# EAGLE board 2016-02-08_10-59-06 (EAGLE 7.3.0)
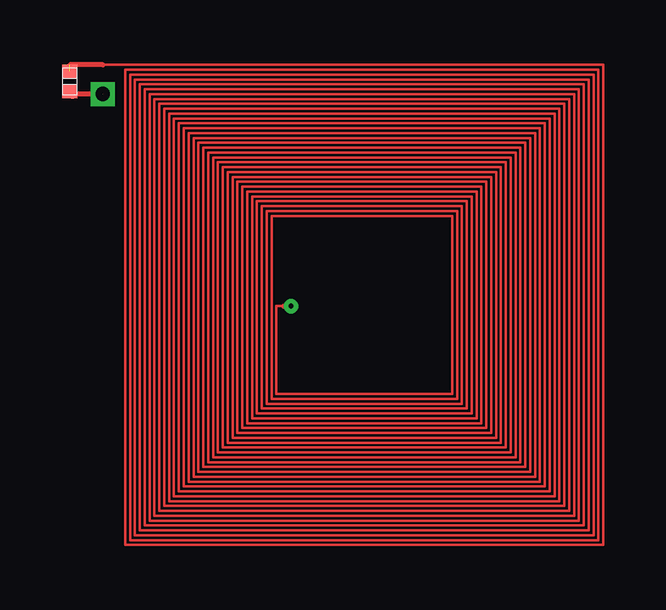
[diagram p0: board, top side]
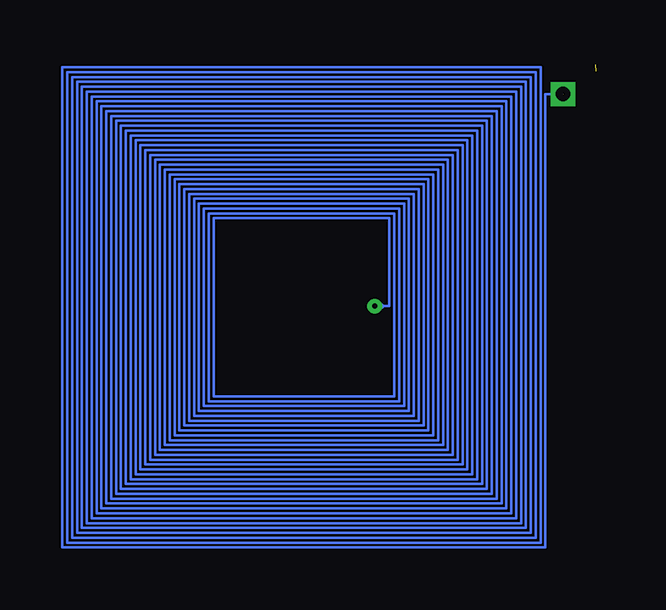
[diagram p1: board, bottom side, seen from below]

No outline drawn. Coordinates in mm, seen from the top.
Copper layers ((1*2)+(15*16)): TOP 0.035mm / dielectric 1.5mm / INTERNAL1 0.035mm / dielectric 0.15mm / layer 15 0.035mm / dielectric 0.2mm / BOTTOM 0.035mm
Design rules "custom": minimum track width 10mil, minimum drill 0.6mm, track to track 8mil, track to pad 8mil, pad to pad 8mil, via to via 8mil, smd to smd 8mil, copper to edge 40mil, drill to drill 8mil, minimum pad ring 10mil, minimum via ring 8mil, stop-mask expansion 4mil, vias tented up to drill 0mil, thermal gap 10mil

## Footprints (pad centres in the part's own frame; a part is rotated, then mirrored left to right if it is on the bottom)
0402 = smd 0.559 x 0.61: 1 -0.419,0; 2 0.419,0

## Placement (x,y rotation side)
CSENSOR  [0402]  1.04,20.04 90 top

## Library data of the parts
CSENSOR = ultra-librarian

## Nets
3: CSENSOR.1 CSENSOR.2

## Tracks (layer width: path | path; a pad name or v marks a point on that pad's centre or on a via)
3  (via drill 0.2 pad 0.61, 0.6)  (2 unrouted)
  TOP 0.102: 2.42,20.73 23.27,20.73 23.27,0.71 3.35,0.71 3.35,20.53 23.07,20.53 23.07,0.91 3.56,0.91 3.56,20.32 22.87,20.32 22.87,1.11 3.76,1.11 3.76,20.12 22.67,20.12 22.67,1.32 3.96,1.32 3.96,19.92 22.46,19.92 22.46,1.52 4.17,1.52 4.17,19.71 22.26,19.71 22.26,1.72 4.37,1.72 4.37,19.51 22.06,19.51 22.06,1.93 4.57,1.93 4.57,19.31 21.85,19.31 21.85,2.13 4.78,2.13 4.78,19.11 21.65,19.11 21.65,2.33 4.98,2.33 4.98,18.9 21.45,18.9 21.45,2.54 5.18,2.54 5.18,18.7 21.24,18.7 21.24,2.74 5.38,2.74 5.38,18.5 21.04,18.5 21.04,2.94 5.59,2.94 5.59,18.29 20.84,18.29 20.84,3.15 5.79,3.15 5.79,18.09 20.63,18.09 20.63,3.35 5.99,3.35 5.99,17.89 20.43,17.89 20.43,3.55 6.2,3.55 6.2,17.68 20.23,17.68 20.23,3.75 6.4,3.75 6.4,17.48 20.02,17.48 20.02,3.96 6.6,3.96 6.6,17.28 19.82,17.28 19.82,4.16 6.81,4.16 6.81,17.07 19.62,17.07 19.62,4.36 7.01,4.36 7.01,16.87 19.41,16.87 19.41,4.57 7.21,4.57 7.21,16.67 19.21,16.67 19.21,4.77 7.42,4.77 7.42,16.46 19.01,16.46 19.01,4.97 7.62,4.97 7.62,16.26 18.8,16.26 18.8,5.18 7.82,5.18 7.82,16.06 18.6,16.06 18.6,5.38 8.03,5.38 8.03,15.85 18.4,15.85 18.4,5.58 8.23,5.58 8.23,15.65 18.2,15.65 18.2,5.79 8.43,5.79 8.43,15.45 17.99,15.45 17.99,5.99 8.64,5.99 8.64,15.24 17.79,15.24 17.79,6.19 8.84,6.19 8.84,15.04 17.59,15.04 17.59,6.4 9.04,6.4 9.04,14.84 17.38,14.84 17.38,6.6 9.25,6.6 9.25,14.63 17.18,14.63 17.18,6.8 9.45,6.8 9.45,14.43 16.98,14.43 16.98,7.01 9.65,7.01 9.65,10.67 9.96,10.67
  TOP 0.203: 9.96,10.67 v10.26,10.67 | 2.42,20.73 1.05,20.73 | v2.42,19.51 1.15,19.51
  TOP 0.406: 1.15,19.51 CSENSOR.1
  BOTTOM 0.102: 9.96,10.67 9.65,10.67 9.65,14.33 16.98,14.33 16.98,6.9 9.45,6.9 9.45,14.53 17.18,14.53 17.18,6.7 9.25,6.7 9.25,14.74 17.38,14.74 17.38,6.5 9.04,6.5 9.04,14.94 17.59,14.94 17.59,6.29 8.84,6.29 8.84,15.14 17.79,15.14 17.79,6.09 8.64,6.09 8.64,15.35 17.99,15.35 17.99,5.89 8.43,5.89 8.43,15.55 18.2,15.55 18.2,5.68 8.23,5.68 8.23,15.75 18.4,15.75 18.4,5.48 8.03,5.48 8.03,15.96 18.6,15.96 18.6,5.28 7.82,5.28 7.82,16.16 18.8,16.16 18.8,5.08 7.62,5.08 7.62,16.36 19.01,16.36 19.01,4.87 7.42,4.87 7.42,16.57 19.21,16.57 19.21,4.67 7.21,4.67 7.21,16.77 19.41,16.77 19.41,4.47 7.01,4.47 7.01,16.97 19.62,16.97 19.62,4.26 6.81,4.26 6.81,17.18 19.82,17.18 19.82,4.06 6.6,4.06 6.6,17.38 20.02,17.38 20.02,3.86 6.4,3.86 6.4,17.58 20.23,17.58 20.23,3.65 6.2,3.65 6.2,17.78 20.43,17.78 20.43,3.45 5.99,3.45 5.99,17.99 20.63,17.99 20.63,3.25 5.79,3.25 5.79,18.19 20.84,18.19 20.84,3.04 5.59,3.04 5.59,18.39 21.04,18.39 21.04,2.84 5.38,2.84 5.38,18.6 21.24,18.6 21.24,2.64 5.18,2.64 5.18,18.8 21.45,18.8 21.45,2.43 4.98,2.43 4.98,19 21.65,19 21.65,2.23 4.78,2.23 4.78,19.21 21.85,19.21 21.85,2.03 4.57,2.03 4.57,19.41 22.06,19.41 22.06,1.82 4.37,1.82 4.37,19.61 22.26,19.61 22.26,1.62 4.17,1.62 4.17,19.82 22.46,19.82 22.46,1.42 3.96,1.42 3.96,20.02 22.67,20.02 22.67,1.22 3.76,1.22 3.76,20.22 22.87,20.22 22.87,1.01 3.56,1.01 3.56,20.43 23.07,20.43 23.07,0.81 3.35,0.81 3.35,20.63 23.27,20.63 23.27,0.6 3.15,0.6 3.15,19.51 2.78,19.51
  BOTTOM 0.203: 9.96,10.67 v10.26,10.67 | 2.78,19.51 v2.42,19.51
  other vias: 2.41,19.51